# Altium PCB MainBoardSTM32.PcbDoc
Units mil, origin at the board's own origin, x right, y up, seen from the top; angles counter-clockwise.
Board outline 3645 x 3860 mil, 2 copper layers (Top Layer, Bottom Layer); 38 components, 43 nets, 174 pads, 187 vias.
Unrouted connection lines stored in the file: 7.
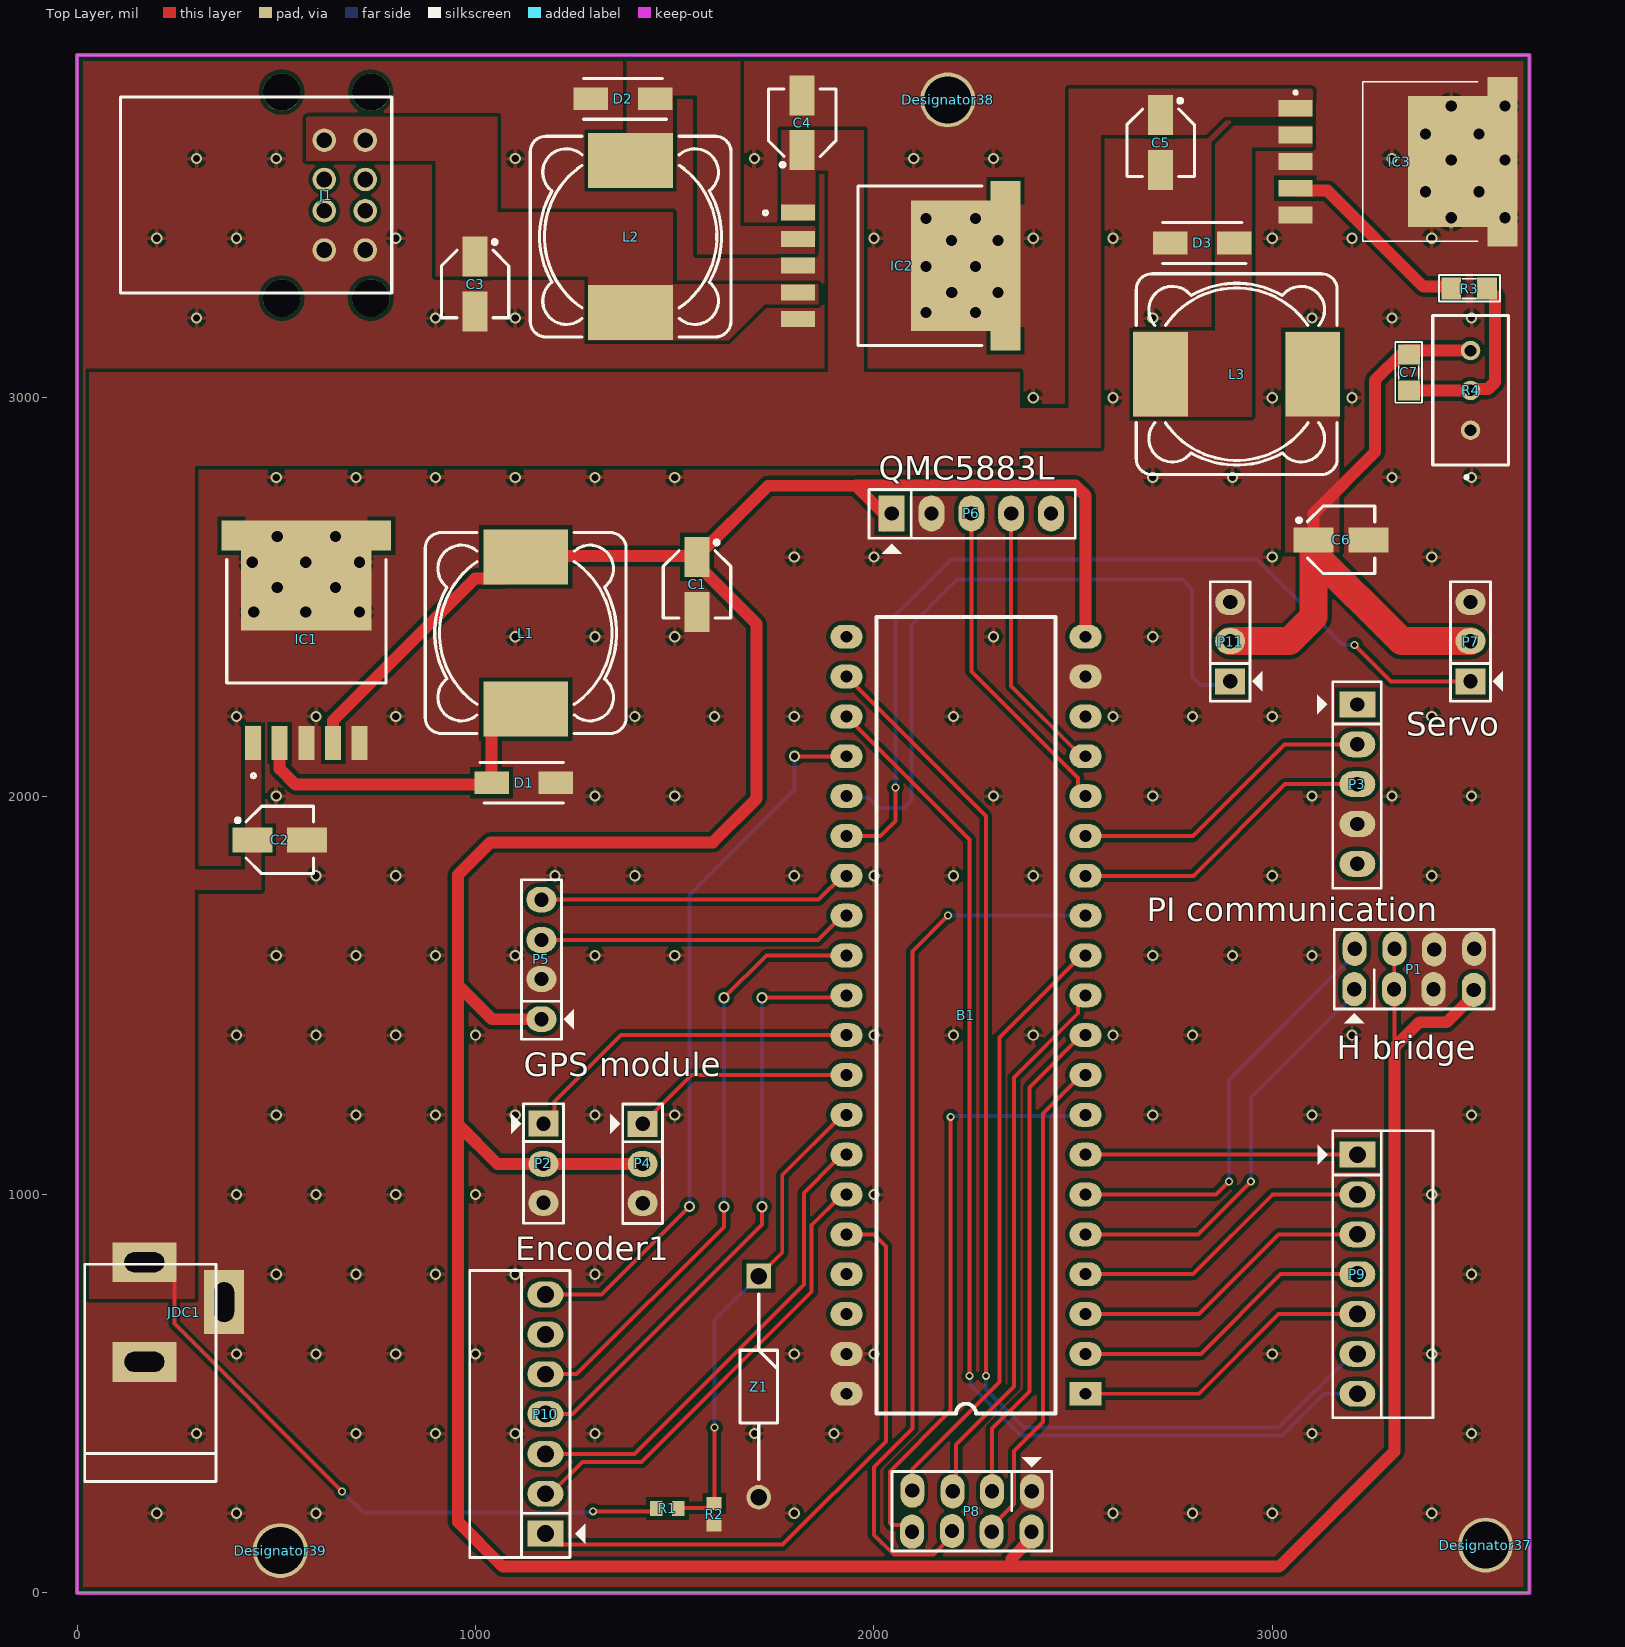
[diagram p0: Top Layer view]
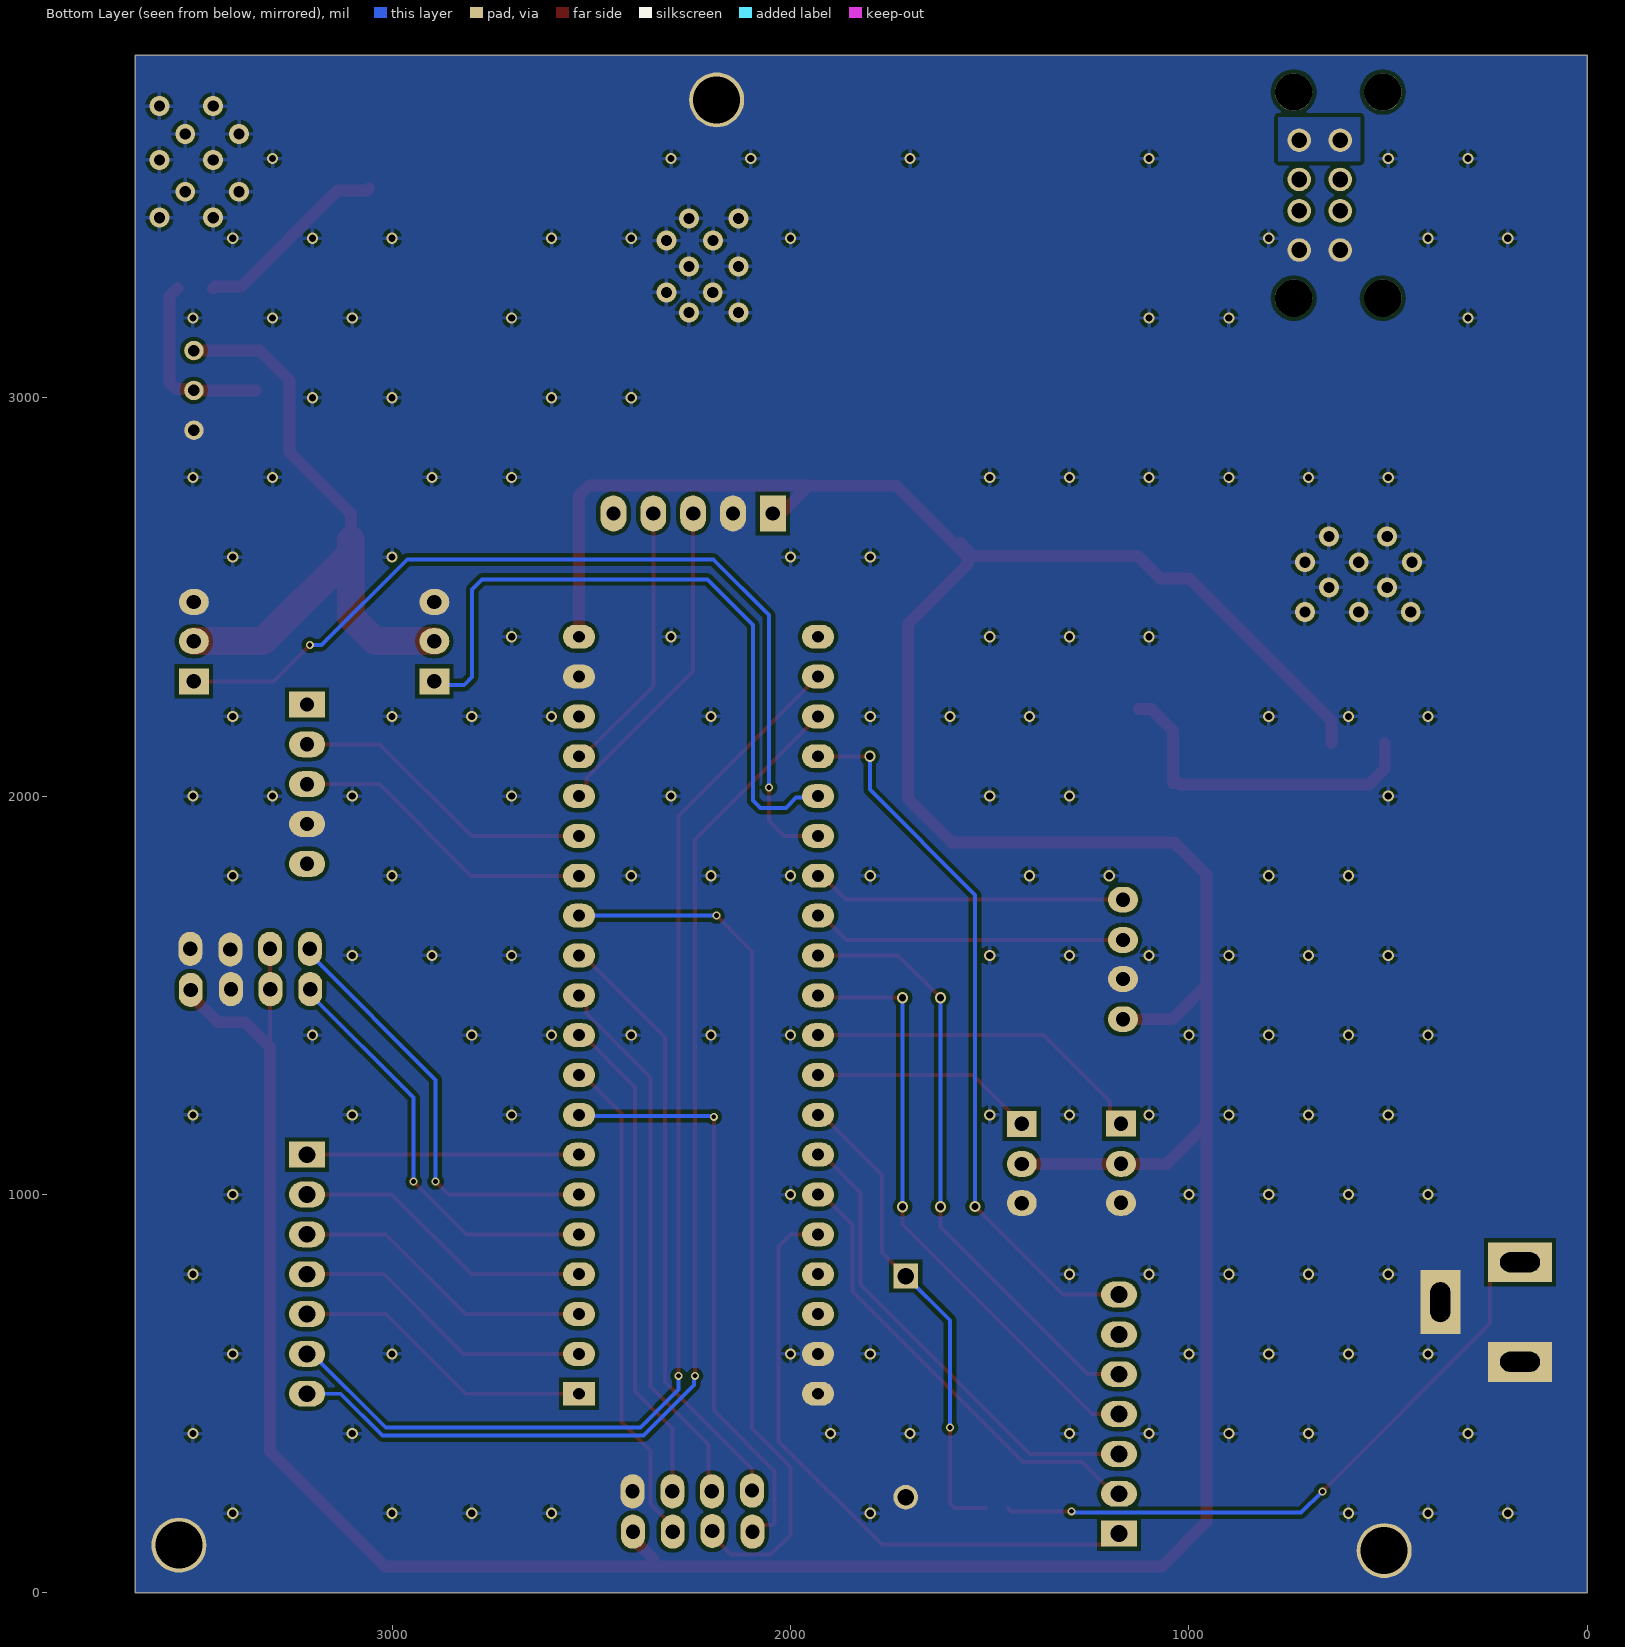
[diagram p1: Bottom Layer view, seen from below]
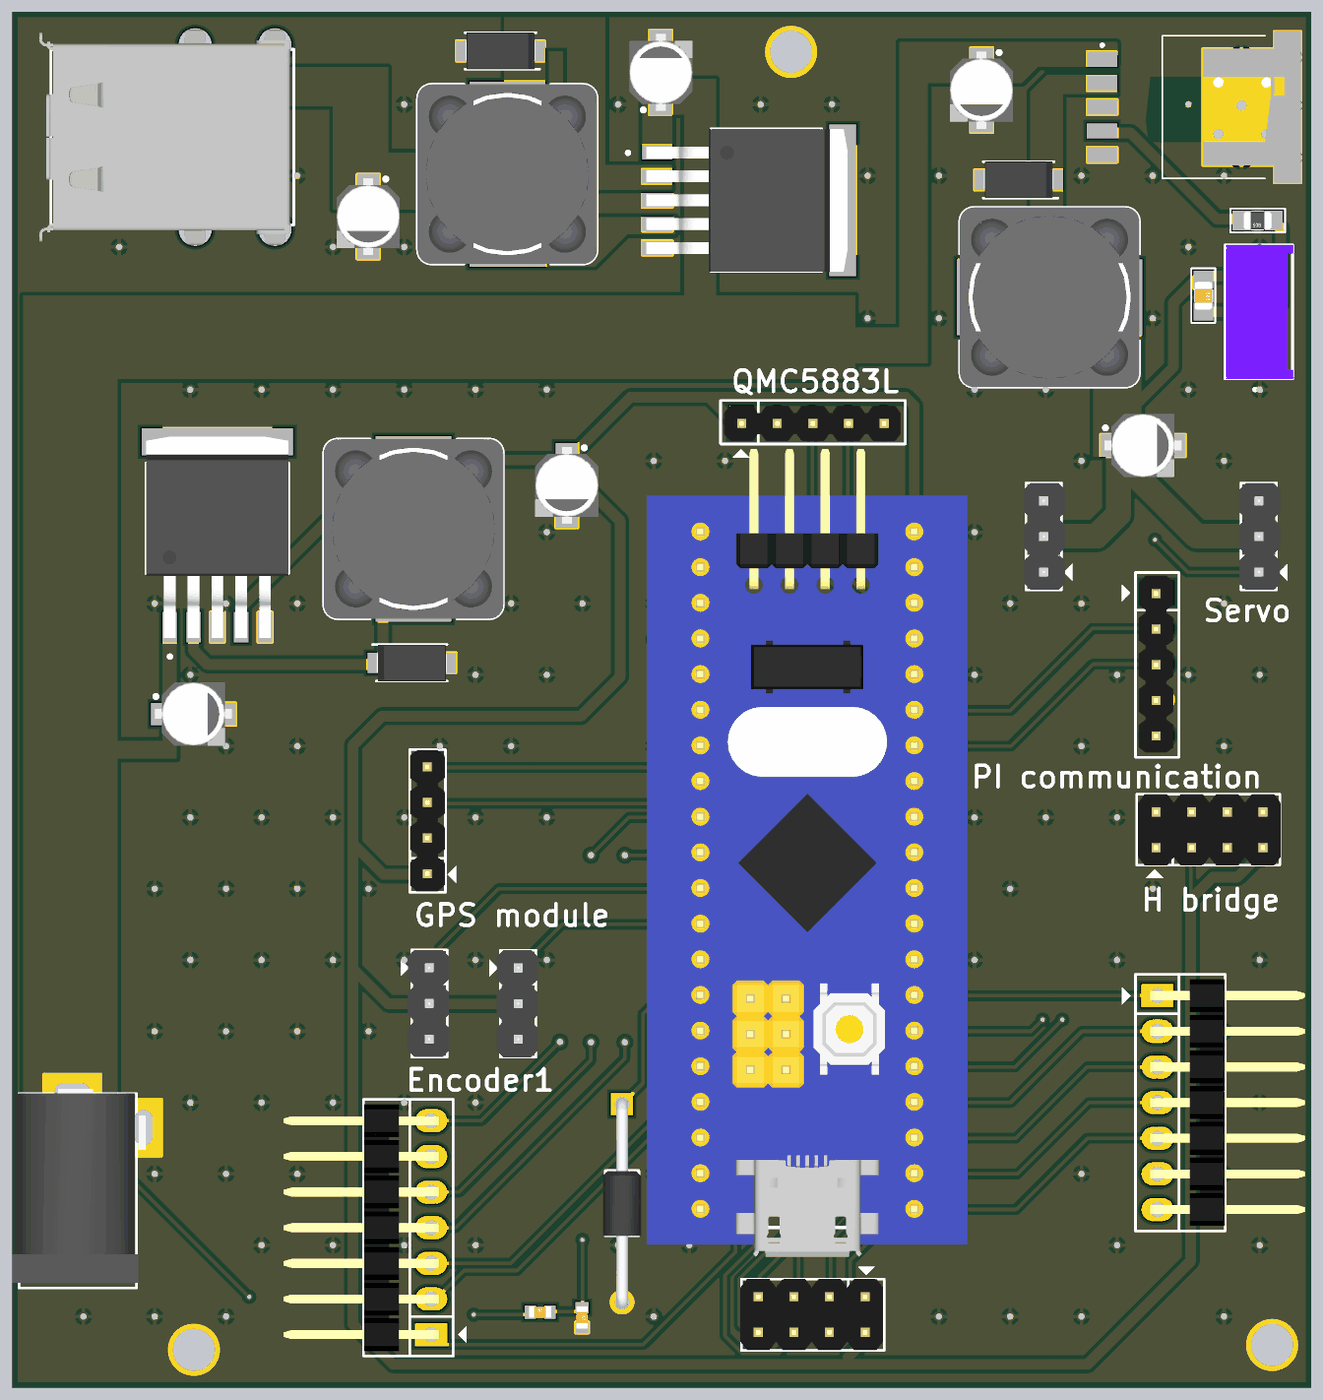
[diagram p2: 3D render of the assembled board from above, using the file's embedded part models]

## Layer stack, top to bottom
Top Solder: solder mask 0.4, Solder Resist, Dk 3.5
Top Layer: signal copper 1.4
Dielectric 1: dielectric 12.6, FR-4, Dk 4.8
Bottom Layer: signal copper 1.4
Bottom Solder: solder mask 0.4, Solder Resist, Dk 3.5

## Board outline
0,0 0,3860 3645,3860 3645,0

## Design rules (kind name [scope] priority, off if disabled: settings)
Clearance [All] p1: gap=10 ignorepadtopadclearanceinfootprint=FALSE except(0: Arc-Hole Track-Hole SMDPad-Hole THPad-Hole Via-Hole Fill-Hole Poly-Hole Region-Hole Text-Hole)
PolygonConnect PolygonConnect_39 [All vs IsNamedPolygon('Top Layer-GND')] p1: thpad.connectstyle=Direct thpad.reliefconductorwidth=10 thpad.reliefentries=4 thpad.polygonreliefangle="90 Angle" thpad.airgapwidth=10 smdpad.connectstyle=Direct smdpad.reliefconductorwidth=10 smdpad.reliefentries=4 smdpad.polygonreliefangle="90 Angle" smdpad.airgapwidth=10 via.connectstyle=Relief via.reliefconductorwidth=10 via.reliefentries=4 via.polygonreliefangle="90 Angle" via.airgapwidth=10
PolygonConnect PolygonConnect_38 [All vs IsNamedPolygon('Bottom Layer-GND')] p2: thpad.connectstyle=Direct thpad.reliefconductorwidth=10 thpad.reliefentries=4 thpad.polygonreliefangle="90 Angle" thpad.airgapwidth=10 smdpad.connectstyle=Direct smdpad.reliefconductorwidth=10 smdpad.reliefentries=4 smdpad.polygonreliefangle="90 Angle" smdpad.airgapwidth=10 via.connectstyle=Relief via.reliefconductorwidth=10 via.reliefentries=4 via.polygonreliefangle="90 Angle" via.airgapwidth=10
PolygonConnect PolygonConnect_37 [All vs IsNamedPolygon('Top Layer-GND')] p3: thpad.connectstyle=Direct thpad.reliefconductorwidth=10 thpad.reliefentries=4 thpad.polygonreliefangle="90 Angle" thpad.airgapwidth=10 smdpad.connectstyle=Direct smdpad.reliefconductorwidth=10 smdpad.reliefentries=4 smdpad.polygonreliefangle="90 Angle" smdpad.airgapwidth=10 via.connectstyle=Relief via.reliefconductorwidth=10 via.reliefentries=4 via.polygonreliefangle="90 Angle" via.airgapwidth=10
PolygonConnect PolygonConnect_36 [All vs IsNamedPolygon('Top Layer-No Net 1')] p4: thpad.connectstyle=Direct thpad.reliefconductorwidth=10 thpad.reliefentries=4 thpad.polygonreliefangle="90 Angle" thpad.airgapwidth=10 smdpad.connectstyle=Direct smdpad.reliefconductorwidth=10 smdpad.reliefentries=4 smdpad.polygonreliefangle="90 Angle" smdpad.airgapwidth=10 via.connectstyle=Relief via.reliefconductorwidth=10 via.reliefentries=4 via.polygonreliefangle="90 Angle" via.airgapwidth=10
PolygonConnect PolygonConnect_35 [All vs IsNamedPolygon('Top Layer-No Net')] p5: thpad.connectstyle=Direct thpad.reliefconductorwidth=10 thpad.reliefentries=4 thpad.polygonreliefangle="90 Angle" thpad.airgapwidth=10 smdpad.connectstyle=Direct smdpad.reliefconductorwidth=10 smdpad.reliefentries=4 smdpad.polygonreliefangle="90 Angle" smdpad.airgapwidth=10 via.connectstyle=Relief via.reliefconductorwidth=10 via.reliefentries=4 via.polygonreliefangle="90 Angle" via.airgapwidth=10
PolygonConnect PolygonConnect_34 [All vs IsNamedPolygon('Top Layer-12-5')] p6: thpad.connectstyle=Direct thpad.reliefconductorwidth=10 thpad.reliefentries=4 thpad.polygonreliefangle="90 Angle" thpad.airgapwidth=10 smdpad.connectstyle=Direct smdpad.reliefconductorwidth=10 smdpad.reliefentries=4 smdpad.polygonreliefangle="90 Angle" smdpad.airgapwidth=10 via.connectstyle=Relief via.reliefconductorwidth=10 via.reliefentries=4 via.polygonreliefangle="90 Angle" via.airgapwidth=10
PolygonConnect PolygonConnect_33 [All vs IsNamedPolygon('Top Layer-VCC6V')] p7: thpad.connectstyle=Direct thpad.reliefconductorwidth=10 thpad.reliefentries=4 thpad.polygonreliefangle="90 Angle" thpad.airgapwidth=10 smdpad.connectstyle=Direct smdpad.reliefconductorwidth=10 smdpad.reliefentries=4 smdpad.polygonreliefangle="90 Angle" smdpad.airgapwidth=10 via.connectstyle=Relief via.reliefconductorwidth=10 via.reliefentries=4 via.polygonreliefangle="90 Angle" via.airgapwidth=10
PolygonConnect PolygonConnect_32 [All vs IsNamedPolygon('Top Layer-output6V')] p8: thpad.connectstyle=Direct thpad.reliefconductorwidth=10 thpad.reliefentries=4 thpad.polygonreliefangle="90 Angle" thpad.airgapwidth=10 smdpad.connectstyle=Direct smdpad.reliefconductorwidth=10 smdpad.reliefentries=4 smdpad.polygonreliefangle="90 Angle" smdpad.airgapwidth=10 via.connectstyle=Relief via.reliefconductorwidth=10 via.reliefentries=4 via.polygonreliefangle="90 Angle" via.airgapwidth=10
PolygonConnect PolygonConnect_31 [All vs IsNamedPolygon('Top Layer-12-6')] p9: thpad.connectstyle=Direct thpad.reliefconductorwidth=10 thpad.reliefentries=4 thpad.polygonreliefangle="90 Angle" thpad.airgapwidth=10 smdpad.connectstyle=Direct smdpad.reliefconductorwidth=10 smdpad.reliefentries=4 smdpad.polygonreliefangle="90 Angle" smdpad.airgapwidth=10 via.connectstyle=Relief via.reliefconductorwidth=10 via.reliefentries=4 via.polygonreliefangle="90 Angle" via.airgapwidth=10
PolygonConnect PolygonConnect_30 [All vs IsNamedPolygon('Top Layer-VCC5V')] p10: thpad.connectstyle=Direct thpad.reliefconductorwidth=10 thpad.reliefentries=4 thpad.polygonreliefangle="90 Angle" thpad.airgapwidth=10 smdpad.connectstyle=Direct smdpad.reliefconductorwidth=10 smdpad.reliefentries=4 smdpad.polygonreliefangle="90 Angle" smdpad.airgapwidth=10 via.connectstyle=Relief via.reliefconductorwidth=10 via.reliefentries=4 via.polygonreliefangle="90 Angle" via.airgapwidth=10
PolygonConnect PolygonConnect_29 [All vs IsNamedPolygon('Top Layer-12-5')] p11: thpad.connectstyle=Direct thpad.reliefconductorwidth=10 thpad.reliefentries=4 thpad.polygonreliefangle="90 Angle" thpad.airgapwidth=10 smdpad.connectstyle=Direct smdpad.reliefconductorwidth=10 smdpad.reliefentries=4 smdpad.polygonreliefangle="90 Angle" smdpad.airgapwidth=10 via.connectstyle=Relief via.reliefconductorwidth=10 via.reliefentries=4 via.polygonreliefangle="90 Angle" via.airgapwidth=10
PolygonConnect PolygonConnect_28 [All vs IsNamedPolygon('Top Layer-output5v')] p12: thpad.connectstyle=Direct thpad.reliefconductorwidth=10 thpad.reliefentries=4 thpad.polygonreliefangle="90 Angle" thpad.airgapwidth=10 smdpad.connectstyle=Direct smdpad.reliefconductorwidth=10 smdpad.reliefentries=4 smdpad.polygonreliefangle="90 Angle" smdpad.airgapwidth=10 via.connectstyle=Relief via.reliefconductorwidth=10 via.reliefentries=4 via.polygonreliefangle="90 Angle" via.airgapwidth=10
PolygonConnect PolygonConnect_27 [All vs IsNamedPolygon('Top Layer-12-3')] p13: thpad.connectstyle=Direct thpad.reliefconductorwidth=10 thpad.reliefentries=4 thpad.polygonreliefangle="90 Angle" thpad.airgapwidth=10 smdpad.connectstyle=Direct smdpad.reliefconductorwidth=10 smdpad.reliefentries=4 smdpad.polygonreliefangle="90 Angle" smdpad.airgapwidth=10 via.connectstyle=Relief via.reliefconductorwidth=10 via.reliefentries=4 via.polygonreliefangle="90 Angle" via.airgapwidth=10
PolygonConnect PolygonConnect_26 [All vs IsNamedPolygon('Top Layer-VCC6V')] p14: thpad.connectstyle=Direct thpad.reliefconductorwidth=10 thpad.reliefentries=4 thpad.polygonreliefangle="90 Angle" thpad.airgapwidth=10 smdpad.connectstyle=Direct smdpad.reliefconductorwidth=10 smdpad.reliefentries=4 smdpad.polygonreliefangle="90 Angle" smdpad.airgapwidth=10 via.connectstyle=Relief via.reliefconductorwidth=10 via.reliefentries=4 via.polygonreliefangle="90 Angle" via.airgapwidth=10
PolygonConnect PolygonConnect_25 [All vs IsNamedPolygon('Bottom Layer-GND')] p15: thpad.connectstyle=Direct thpad.reliefconductorwidth=10 thpad.reliefentries=4 thpad.polygonreliefangle="90 Angle" thpad.airgapwidth=10 smdpad.connectstyle=Direct smdpad.reliefconductorwidth=10 smdpad.reliefentries=4 smdpad.polygonreliefangle="90 Angle" smdpad.airgapwidth=10 via.connectstyle=Relief via.reliefconductorwidth=10 via.reliefentries=4 via.polygonreliefangle="90 Angle" via.airgapwidth=10
PolygonConnect PolygonConnect_24 [All vs IsNamedPolygon('Top Layer-GND')] p16: thpad.connectstyle=Direct thpad.reliefconductorwidth=10 thpad.reliefentries=4 thpad.polygonreliefangle="90 Angle" thpad.airgapwidth=10 smdpad.connectstyle=Direct smdpad.reliefconductorwidth=10 smdpad.reliefentries=4 smdpad.polygonreliefangle="90 Angle" smdpad.airgapwidth=10 via.connectstyle=Relief via.reliefconductorwidth=10 via.reliefentries=4 via.polygonreliefangle="90 Angle" via.airgapwidth=10
PolygonConnect PolygonConnect_23 [All vs IsNamedPolygon('Bottom Layer-5V')] p17: thpad.connectstyle=Direct thpad.reliefconductorwidth=10 thpad.reliefentries=4 thpad.polygonreliefangle="90 Angle" thpad.airgapwidth=10 smdpad.connectstyle=Direct smdpad.reliefconductorwidth=10 smdpad.reliefentries=4 smdpad.polygonreliefangle="90 Angle" smdpad.airgapwidth=10 via.connectstyle=Relief via.reliefconductorwidth=10 via.reliefentries=4 via.polygonreliefangle="90 Angle" via.airgapwidth=10
PolygonConnect PolygonConnect_22 [All vs IsNamedPolygon('Top Layer-GND')] p18: thpad.connectstyle=Direct thpad.reliefconductorwidth=10 thpad.reliefentries=4 thpad.polygonreliefangle="90 Angle" thpad.airgapwidth=10 smdpad.connectstyle=Direct smdpad.reliefconductorwidth=10 smdpad.reliefentries=4 smdpad.polygonreliefangle="90 Angle" smdpad.airgapwidth=10 via.connectstyle=Relief via.reliefconductorwidth=10 via.reliefentries=4 via.polygonreliefangle="90 Angle" via.airgapwidth=10
PolygonConnect PolygonConnect_21 [All vs IsNamedPolygon('Top Layer-12-3')] p19: thpad.connectstyle=Direct thpad.reliefconductorwidth=10 thpad.reliefentries=4 thpad.polygonreliefangle="90 Angle" thpad.airgapwidth=10 smdpad.connectstyle=Direct smdpad.reliefconductorwidth=10 smdpad.reliefentries=4 smdpad.polygonreliefangle="90 Angle" smdpad.airgapwidth=10 via.connectstyle=Relief via.reliefconductorwidth=10 via.reliefentries=4 via.polygonreliefangle="90 Angle" via.airgapwidth=10
PolygonConnect PolygonConnect_20 [All vs IsNamedPolygon('Top Layer-No Net 8')] p20: thpad.connectstyle=Direct thpad.reliefconductorwidth=10 thpad.reliefentries=4 thpad.polygonreliefangle="90 Angle" thpad.airgapwidth=10 smdpad.connectstyle=Direct smdpad.reliefconductorwidth=10 smdpad.reliefentries=4 smdpad.polygonreliefangle="90 Angle" smdpad.airgapwidth=10 via.connectstyle=Relief via.reliefconductorwidth=10 via.reliefentries=4 via.polygonreliefangle="90 Angle" via.airgapwidth=10
PolygonConnect PolygonConnect_19 [All vs IsNamedPolygon('Top Layer-No Net 8')] p21: thpad.connectstyle=Direct thpad.reliefconductorwidth=10 thpad.reliefentries=4 thpad.polygonreliefangle="90 Angle" thpad.airgapwidth=10 smdpad.connectstyle=Direct smdpad.reliefconductorwidth=10 smdpad.reliefentries=4 smdpad.polygonreliefangle="90 Angle" smdpad.airgapwidth=10 via.connectstyle=Relief via.reliefconductorwidth=10 via.reliefentries=4 via.polygonreliefangle="90 Angle" via.airgapwidth=10
PolygonConnect PolygonConnect_18 [All vs IsNamedPolygon('Top Layer-No Net 9')] p22: thpad.connectstyle=Direct thpad.reliefconductorwidth=10 thpad.reliefentries=4 thpad.polygonreliefangle="90 Angle" thpad.airgapwidth=10 smdpad.connectstyle=Direct smdpad.reliefconductorwidth=10 smdpad.reliefentries=4 smdpad.polygonreliefangle="90 Angle" smdpad.airgapwidth=10 via.connectstyle=Relief via.reliefconductorwidth=10 via.reliefentries=4 via.polygonreliefangle="90 Angle" via.airgapwidth=10
PolygonConnect PolygonConnect_17 [All vs IsNamedPolygon('Top Layer- 12V Main')] p23: thpad.connectstyle=Direct thpad.reliefconductorwidth=10 thpad.reliefentries=4 thpad.polygonreliefangle="90 Angle" thpad.airgapwidth=10 smdpad.connectstyle=Direct smdpad.reliefconductorwidth=10 smdpad.reliefentries=4 smdpad.polygonreliefangle="90 Angle" smdpad.airgapwidth=10 via.connectstyle=Relief via.reliefconductorwidth=10 via.reliefentries=4 via.polygonreliefangle="90 Angle" via.airgapwidth=10
PolygonConnect PolygonConnect_16 [All vs IsNamedPolygon('Top Layer-output6V')] p24: thpad.connectstyle=Direct thpad.reliefconductorwidth=10 thpad.reliefentries=4 thpad.polygonreliefangle="90 Angle" thpad.airgapwidth=10 smdpad.connectstyle=Direct smdpad.reliefconductorwidth=10 smdpad.reliefentries=4 smdpad.polygonreliefangle="90 Angle" smdpad.airgapwidth=10 via.connectstyle=Relief via.reliefconductorwidth=10 via.reliefentries=4 via.polygonreliefangle="90 Angle" via.airgapwidth=10
PolygonConnect PolygonConnect_15 [All vs IsNamedPolygon('Top Layer-No Net 2')] p25: thpad.connectstyle=Direct thpad.reliefconductorwidth=10 thpad.reliefentries=4 thpad.polygonreliefangle="90 Angle" thpad.airgapwidth=10 smdpad.connectstyle=Direct smdpad.reliefconductorwidth=10 smdpad.reliefentries=4 smdpad.polygonreliefangle="90 Angle" smdpad.airgapwidth=10 via.connectstyle=Relief via.reliefconductorwidth=10 via.reliefentries=4 via.polygonreliefangle="90 Angle" via.airgapwidth=10
PolygonConnect PolygonConnect_14 [All vs IsNamedPolygon('Top Layer- 12-5')] p26: thpad.connectstyle=Direct thpad.reliefconductorwidth=10 thpad.reliefentries=4 thpad.polygonreliefangle="90 Angle" thpad.airgapwidth=10 smdpad.connectstyle=Direct smdpad.reliefconductorwidth=10 smdpad.reliefentries=4 smdpad.polygonreliefangle="90 Angle" smdpad.airgapwidth=10 via.connectstyle=Relief via.reliefconductorwidth=10 via.reliefentries=4 via.polygonreliefangle="90 Angle" via.airgapwidth=10
PolygonConnect PolygonConnect_13 [All vs IsNamedPolygon('Top Layer-12-6')] p27: thpad.connectstyle=Direct thpad.reliefconductorwidth=10 thpad.reliefentries=4 thpad.polygonreliefangle="90 Angle" thpad.airgapwidth=10 smdpad.connectstyle=Direct smdpad.reliefconductorwidth=10 smdpad.reliefentries=4 smdpad.polygonreliefangle="90 Angle" smdpad.airgapwidth=10 via.connectstyle=Relief via.reliefconductorwidth=10 via.reliefentries=4 via.polygonreliefangle="90 Angle" via.airgapwidth=10
PolygonConnect PolygonConnect_12 [All vs IsNamedPolygon('Top Layer-12-5')] p28: thpad.connectstyle=Direct thpad.reliefconductorwidth=10 thpad.reliefentries=4 thpad.polygonreliefangle="90 Angle" thpad.airgapwidth=10 smdpad.connectstyle=Direct smdpad.reliefconductorwidth=10 smdpad.reliefentries=4 smdpad.polygonreliefangle="90 Angle" smdpad.airgapwidth=10 via.connectstyle=Relief via.reliefconductorwidth=10 via.reliefentries=4 via.polygonreliefangle="90 Angle" via.airgapwidth=10
PolygonConnect PolygonConnect_11 [All vs IsNamedPolygon('Top Layer-12-6')] p29: connectstyle=Direct reliefconductorwidth=10 reliefentries=4 polygonreliefangle="90 Angle" airgapwidth=10
PolygonConnect PolygonConnect_10 [All vs IsNamedPolygon('Top Layer-12-6')] p30: connectstyle=Direct reliefconductorwidth=10 reliefentries=4 polygonreliefangle="90 Angle" airgapwidth=10
PolygonConnect PolygonConnect_9 [All vs IsNamedPolygon('Top Layer-12-5')] p31: connectstyle=Direct reliefconductorwidth=10 reliefentries=4 polygonreliefangle="90 Angle" airgapwidth=10
PolygonConnect PolygonConnect_8 [All vs IsNamedPolygon('Top Layer-12-6')] p32: connectstyle=Direct reliefconductorwidth=10 reliefentries=4 polygonreliefangle="90 Angle" airgapwidth=10
PolygonConnect PolygonConnect_7 [All vs IsNamedPolygon('Top Layer- 12-5')] p33: connectstyle=Direct reliefconductorwidth=10 reliefentries=4 polygonreliefangle="90 Angle" airgapwidth=10
PolygonConnect PolygonConnect_6 [InNet('OUTPUT5V') vs IsNamedPolygon('Top Layer-No Net 2')] p34: connectstyle=Direct reliefconductorwidth=10 reliefentries=4 polygonreliefangle="90 Angle" airgapwidth=10
PolygonConnect PolygonConnect_5 [All vs IsNamedPolygon('Top Layer-No Net 2')] p35: connectstyle=Direct reliefconductorwidth=10 reliefentries=4 polygonreliefangle="90 Angle" airgapwidth=10
PolygonConnect PolygonConnect_4 [All vs IsNamedPolygon('Top Layer-No Net 2')] p36: thpad.connectstyle=Direct thpad.reliefconductorwidth=10 thpad.reliefentries=4 thpad.polygonreliefangle="90 Angle" thpad.airgapwidth=10 smdpad.connectstyle=Direct smdpad.reliefconductorwidth=10 smdpad.reliefentries=4 smdpad.polygonreliefangle="90 Angle" smdpad.airgapwidth=10 via.connectstyle=Relief via.reliefconductorwidth=10 via.reliefentries=4 via.polygonreliefangle="90 Angle" via.airgapwidth=10
PolygonConnect PolygonConnect_3 [All vs IsNamedPolygon('Top Layer-No Net 2')] p37: thpad.connectstyle=Direct thpad.reliefconductorwidth=10 thpad.reliefentries=4 thpad.polygonreliefangle="90 Angle" thpad.airgapwidth=10 smdpad.connectstyle=Direct smdpad.reliefconductorwidth=10 smdpad.reliefentries=4 smdpad.polygonreliefangle="90 Angle" smdpad.airgapwidth=10 via.connectstyle=Relief via.reliefconductorwidth=10 via.reliefentries=4 via.polygonreliefangle="90 Angle" via.airgapwidth=10
PolygonConnect PolygonConnect_2 [All vs IsNamedPolygon('Top Layer-output6V')] p38: thpad.connectstyle=Direct thpad.reliefconductorwidth=10 thpad.reliefentries=4 thpad.polygonreliefangle="90 Angle" thpad.airgapwidth=10 smdpad.connectstyle=Direct smdpad.reliefconductorwidth=10 smdpad.reliefentries=4 smdpad.polygonreliefangle="90 Angle" smdpad.airgapwidth=10 via.connectstyle=Relief via.reliefconductorwidth=10 via.reliefentries=4 via.polygonreliefangle="90 Angle" via.airgapwidth=10
PolygonConnect PolygonConnect_1 [All vs IsNamedPolygon('Top Layer- 12V Main')] p39: thpad.connectstyle=Direct thpad.reliefconductorwidth=10 thpad.reliefentries=4 thpad.polygonreliefangle="90 Angle" thpad.airgapwidth=10 smdpad.connectstyle=Direct smdpad.reliefconductorwidth=10 smdpad.reliefentries=4 smdpad.polygonreliefangle="90 Angle" smdpad.airgapwidth=10 via.connectstyle=Relief via.reliefconductorwidth=10 via.reliefentries=4 via.polygonreliefangle="90 Angle" via.airgapwidth=10
PolygonConnect [All] p40: connectstyle=Relief reliefconductorwidth=10 reliefentries=4 polygonreliefangle="90 Angle" airgapwidth=10
RoutingVias [All] p1: holewidth=18 width=30 viastyle="Through Hole" minholewidth=12 minwidth=20 maxholewidth=25 maxwidth=28
SolderMaskExpansion [All] p1: expansion=4
Width [All] p1: maxlimit=70 minlimit=10 preferedwidth=30 minimp=50.000000 maximp=50.000000 favimp=50.000000
30 further rules are at their usual default settings.

## Classes and differential pairs
component class MainBoardSTM32: B1 C1 C2 C3 C4 C5 C6 C7 D1 D2 D3 IC1 IC2 IC3 J1 JDC1 L1 L2 L3 P1 P2 P3 P4 P5 P6 P7 P8 P9 P10 P11 R1 R2 R3 R4 Z1

## Components (designator, comment, footprint, x,y, rotation, side; value= is the part's Value field where it differs from the comment)
B1 "Bluepill" Bluepill 2531.05,500 r180 top
C1 "Cap Pol SMD" "CAP ALU SIZE B" 1556.05,2531.41 r270 top value=220uF
C2 "Cap Pol SMD" "CAP ALU SIZE B" 508.7,1890 r0 top value=680uF
C3 "Cap Pol SMD" "CAP ALU SIZE B" 999.05,3285.24 r270 top value=220uF
C4 "Cap Pol SMD" "CAP ALU SIZE B" 1820,3690 r90 top value=680uF
C5 "Cin" "CAP ALU SIZE B" 2719.69,3640.02 r270 top value=470uF
C6 "Cout" "CAP ALU SIZE B" 3172.55,2643.29 r0 top value=220uF
C7 "CFF" CAP-SM-0805 3342.55,3108.29 r270 top value=680uF
D1 "SS54" DIOM5026X262N 1121.05,2033.46 r0 top
D2 "SS54" DIOM5026X262N 1370,3750 r180 top
D3 "SS54" DIOM5026X262N 2824.02,3388.29 r180 top
Designator37 "Comment" "LO KHOAN 3MM" 3535,120 r270 top
Designator38 "Comment" "LO KHOAN 3MM" 2185.39,3747.52 r270 top
Designator39 "Comment" "LO KHOAN 3MM" 510,106.5 r270 top
IC1 "LM2596SX-3.3_NOPB" KTT0005B 575.63,2624.05 r270 top
IC2 "LM2596S-5.0_NOPB" KTT0005B 2300.59,3331.14 r180 top
IC3 "LM2596S-ADJ_NOPB" LM2596SXADJ 3315.67,3592.6 r180 top
J1 "Pi's power" MOLEX-DUALUSB 620.63,3508.37 r270 top
JDC1 "Jack DC" DC-IN 269.12,705 r90 top value="Jac DC"
L1 "Inductor" "INDUCTOR 12.5x12.5" 1126.05,2409.37 r270 top value=33uH
L2 "Inductor" "INDUCTOR 12.5x12.5" 1389.37,3404.33 r90 top value=33uH
L3 "Inductor" "INDUCTOR 12.5x12.5" 2910.63,3059 r180 top value=33uH
P1 "H bridge" JP4x2 3356.05,1565 r0 top
P2 "Encoder1" JP3 1170.63,1078 r270 top
P3 "PI communication" JP5 3213.55,2230 r270 top
P4 "Encoder2" JP3 1419.63,1077.5 r270 top
P5 "GPS module" JP4 1165.63,1540 r90 top
P6 "QMC5883L" JP5 2044.53,2709.39 r0 top
P7 "Servo" JP3 3497.55,2388 r90 top
P8 "NRF24L01" JP4x2 2246.13,205.5 r180 top
P9 "Spare 2" JP7H 3213.55,1100 r270 top
P10 "Spare 1" JP7H 1175.63,149 r90 top
P11 "Header 3" JP3 2894.02,2388 r90 top
R1 "RESISTOR SMD" RES-SM-0603 1454.46,212 r0 top value=1K
R2 "RESISTOR SMD" RES-SM-0603 1599.02,224 r270 top value=1K
R3 "RESISTOR SMD" RES-SM-0805 3539.17,3274 r180 top value=1K
R4 "3296W-1-101LF" 3296W-1 3497.55,3018.29 r90 top
Z1 "1N4728ATR" DIOAD1413W86L463D238 1711.05,795.5 r270 top

## Footprints (in the part's own frame and the unit in brackets; to place one, negate y for a bottom-side part, rotate by r counter-clockwise, add the part's x,y. Pads: shape width x height; smd on the part's side, far side on the other; paste and mask are expansions set on the pad)
3296W-1 [mm]
  round 1.24 hole 0.74: 1(-2.54,0) 2(0,0) 3(2.54,0)
  silkscreen extent -5.64,-2.41 4.76,2.41, body extent -4.78,-2.48 4.78,2.35, height 11.55
Bluepill [mil]
  rect 80x60 / inner rect 100x50 / far side rect 80x60 hole 30: 1(0,0)
  oval 80x60 / inner oval 100x50 / far side oval 80x60 hole 30: 2(0,-100) 3(0,-200) 4(0,-300) 5(0,-400) 6(0,-500) 7(0,-600) 8(0,-700) 9(0,-800) 10(0,-900) 11(0,-1000) 12(0,-1100) 13(0,-1200) 14(0,-1300) 15(0,-1400) 16(0,-1500) 17(0,-1600) 18(0,-1700) 19(0,-1800) 20(0,-1900) 21(600,-1900) 22(600,-1800) 23(600,-1700) 24(600,-1600) 25(600,-1500) 26(600,-1400) 27(600,-1300) 28(600,-1200) 29(600,-1100) 30(600,-1000) 31(600,-900) 32(600,-800) 33(600,-700) 34(600,-600) 35(600,-500) 36(600,-400) 37(600,-300) 38(600,-200) 39(600,-100) 40(600,0)
  silkscreen extent 75,-1950 525,50, body extent -1100,-2133 1000,500, height 385
"CAP ALU SIZE B" [mm] "Capacitor, Aluminium Electrolytric, 4.3mm L X 4.3mm W X 5.4mm H, IPC Medium Density"
  rect 2.55x1.6 smd: 1(-1.75,0) 2(1.75,0)
  silkscreen extent -2.8,-2.15 2.15,2.15, body extent -2.75,-2.25 2.75,2.25, height 5.7
CAP-SM-0805 [mil]
  rect 50x55 smd: 1(0,0) 2(90,0)
  silkscreen extent -32,-34 121,33, body extent 6,-25 84,25, height 31
DC-IN [mil] "Jac DC input"
  rect 100x160 hole 50 slot 100 at 90 deg: 1(125,100) 2(-125,100)
  rect 160x100 hole 50 slot 100 at 0 deg: 3(25,-100)
  silkscreen extent -425,-80 120,250, body extent -410,-105 134,269, height 434
DIOAD1413W86L463D238 [mm]
  rect 1.575x1.575 hole 1.05: 1(0,0)
  round 1.575 hole 1.05: 2(14.1,0)
  silkscreen extent 1.14,-1.19 12.96,1.19, body extent -0.43,-1.36 14.56,1.36, height 2.71
DIOM5026X262N [mm]
  rect 2.2x1.45 smd: 1(-2.05,0) 2(2.05,0)
  silkscreen extent -2.78,-1.3 2.52,1.3, body extent -2.52,-1.3 2.52,1.3, height 2.62
"INDUCTOR 12.5x12.5" [mm] "SMD Inductor  Body Width 12.5mm Body Lenght 12.5mm Height 8mm"
  rect 3.5x5.4 smd: 1(-4.85,0) 2(4.85,0)
  silkscreen extent -6.4,-6.4 6.4,6.4, body extent -6.4,-6.4 6.4,6.4, height 8
JP3 [mil] "Jumper 3"
  rect 65x75 hole 36: 1(-100,0)
  oval 65x75 hole 36: 2(1,0) 3(99,0)
  silkscreen extent -150,-81 150,50, body extent -150,-60 150,55, height 355
JP4 [mil] "Jumper 4"
  oval 65x75 hole 36: 1(-100,0) 2(1,0) 3(99,0) 4(200,0)
  silkscreen extent -150,-81 250,50, body extent -148,-48 248,50, height 323
JP4x2 [mil] "Connector 4x2"
  oval 60x86 hole 36: 1(-150.5,-49.5) 2(-50.5,-49.5) 3(48.5,-49.5) 4(149.5,-51.5) 5(-149.5,51.5) 6(-49.5,51.5) 7(50,50) 8(150.5,51.5)
  silkscreen extent -200,-135 200,100, body extent -197,-100 203,100, height 335
JP5 [mil] "JP5"
  rect 65x90 hole 36: 1(0,0)
  oval 65x90 hole 36: 2(100,0) 3(200,0) 4(300,0) 5(400,0)
  silkscreen extent -57,-101 461,60, body extent -48,-53 448,45, height 323
JP7H [mil]
  rect 65x90 hole 42: 1(0,0)
  oval 65x90 hole 42: 2(100,0) 3(200,0) 4(300,0) 5(400,0) 6(500,0) 7(600,0)
  silkscreen extent -60,-100 660,190, body extent -46,-25 646,414, height 99
KTT0005B [mm]
  rect 2.16x1.02 smd: 1(12.461,-3.4) 2(12.461,-1.7) 3(12.461,0) 4(12.461,1.7) 5(12.461,3.4)
  rect 6.99x8.33 smd: 6(1.786,0)
  rect 1.91x1.235 smd: 7(-0.754,4.782) 8(-0.754,-4.782)
  silkscreen extent 0.76,-5.08 14.68,5.08, body extent -1.11,-5.08 13.24,5.08, height 4.72
LM2596SXADJ [mm]
  rect 2.16x1.07 smd: 1(6.545,-3.4) 2(6.545,-1.7) 3(6.545,0) 4(6.545,1.7) 5(6.545,3.4)
  rect 1.91x10.8 smd: T1(-6.67,0)
  rect 5.08x8.33 smd: T2(-3.175,0)
  silkscreen extent -5.06,-5.08 6.64,5.08, body extent -6.75,-2.3 7.65,2.5
"LO KHOAN 3MM" [mil]
  round 138 hole 118.1: 1(0,0)
MOLEX-DUALUSB [mm]
  round 1.5 hole 1: 1(-3.5,0) 2(-1,0) 3(1,0) 4(3.5,0) 5(-3.5,2.61) 6(-1,2.61) 7(1,2.61) 8(3.5,2.61)
  round 2.38 hole 2.38 unplated: 9(-6.57,2.96) 10(6.57,2.96) 11(6.57,-2.72) 12(-6.57,-2.72)
  silkscreen extent -6.25,-13 6.25,4.3, body extent -7.66,-13.82 7.66,4.04, height 15.78
RES-SM-0603 [mm]
  rect 0.8x0.95 smd: 1(-0.014,0) 2(1.386,0)
  body extent -0.11,-0.4 1.49,0.4, height 0.3
RES-SM-0805 [mil]
  rect 50x55 smd: 1(0,0) 2(90,0)
  silkscreen extent -32,-34 121,33, body extent 6,-25 84,25, height 31

## Part data
C1 C2 C3 C4: "Polarized Capacitor (Radial)"
C5 C6: library part "Cap Pol SMD", "Polarized Capacitor (Radial)"
C7: library part "Cap Non-Pol SMD", "Capacitor"
D1 D2 D3: "Schottky Diode", Manufacturer_Name="DIYI Elec Tech", Datasheet Link=https://datasheet.lcsc.com/szlcsc/DIYI-Elec-Tech-SS54_C84165.pdf, Height=2.62mm, Manufacturer_Part_Number=SS54
IC1: "Integrated Circuit", Arrow Part Number=LM2596SX-3.3/NOPB, Manufacturer_Name="Texas Instruments", Mouser Part Number=926-LM2596SX33NOPB, Arrow Price/Stock=https://www.arrow.com/en/products/lm2596sx-3.3nopb/texas-instruments?region=nac, Datasheet Link=http://www.ti.com/lit/gpn/lm2596, Manufacturer_Part_Number=LM2596SX-3.3/NOPB, Mouser Price/Stock=https://www.mouser.co.uk/ProductDetail/Texas-Instruments/LM2596SX-33-NOPB?qs=X1J7HmVL2ZEm4UYTFC0WWA%3D%3D
IC2: "Integrated Circuit", Arrow Part Number=LM2596S-5.0/NOPB, Manufacturer_Name="Texas Instruments", Mouser Part Number=926-LM2596S-5.0/NOPB, Arrow Price/Stock=https://www.arrow.com/en/products/lm2596s-5.0nopb/texas-instruments?region=nac, Datasheet Link=https://www.ti.com/lit/gpn/LM2596, Manufacturer_Part_Number=LM2596S-5.0/NOPB, Mouser Price/Stock=https://www.mouser.co.uk/ProductDetail/Texas-Instruments/LM2596S-50-NOPB?qs=X1J7HmVL2ZHVjCOmW%252BYINA%3D%3D
IC3: "Integrated Circuit", Arrow Part Number=LM2596S-ADJ/NOPB, Manufacturer_Name="Texas Instruments", Mouser Part Number=926-LM2596S-ADJ/NOPB, Arrow Price/Stock=https://www.arrow.com/en/products/lm2596s-adjnopb/texas-instruments?region=nac, Datasheet Link=https://www.ti.com/lit/ds/symlink/lm2596.pdf?HQS=ti-null-null-sf-df-pf-sep-wwe&ts=1592978195629, Height=4.57mm, Manufacturer_Part_Number=LM2596S-ADJ/NOPB, Mouser Price/Stock=https://www.mouser.co.uk/ProductDetail/Texas-Instruments/LM2596S-ADJ-NOPB?qs=X1J7HmVL2ZHoMN0DLDcNog%3D%3D
J1: library part 67298-3090, "Connector", Manufacturer_Name=Molex, Mouser Part Number=538-67298-3090, Datasheet Link=https://datasheet.datasheetarchive.com/originals/distributors/Datasheets_SAMA/769e69235f305794a0165724e99951b5.pdf, Manufacturer_Part_Number=67298-3090, Mouser Price/Stock=https://www.mouser.co.uk/ProductDetail/Molex/67298-3090?qs=x6EjVpvqMVOYHaae5plDDQ%3D%3D
JDC1: "Jack DC input"
P1 P8: library part "Header 4X2", "Header, 4-Pin, Dual row", LatestRevisionDate=17-Jul-2002, LatestRevisionNote="Re-released for DXP Platform.", Publisher="Altium Limited"
P2 P4 P7: library part "Header 3", "Header, 3-Pin", LatestRevisionDate=17-Jul-2002, LatestRevisionNote="Re-released for DXP Platform.", Publisher="Altium Limited"
P3 P6: library part "Header 5", "Header, 5-Pin", LatestRevisionDate=17-Jul-2002, LatestRevisionNote="Re-released for DXP Platform.", Publisher="Altium Limited"
P5: library part "Header 4", "Header, 4-Pin", LatestRevisionDate=17-Jul-2002, LatestRevisionNote="Re-released for DXP Platform.", Publisher="Altium Limited"
P9 P10: library part "Header 7H", "Header, 7-Pin, Right Angle", LatestRevisionDate=17-Jul-2002, LatestRevisionNote="Re-released for DXP Platform.", Publisher="Altium Limited"
P11: "Header, 3-Pin", LatestRevisionDate=17-Jul-2002, LatestRevisionNote="Re-released for DXP Platform.", Publisher="Altium Limited"
R1 R2 R3: "Resistor"
R4: "Resistor", Manufacturer_Name=Bourns, Mouser Part Number=652-3296W-1-101LF, Arrow Part Number=3296W-1-101LF, Arrow Price/Stock=https://www.arrow.com/en/products/3296w-1-101lf/bourns?region=nac, Datasheet Link=https://www.bourns.com/pdfs/3296.pdf, Manufacturer_Part_Number=3296W-1-101LF, Mouser Price/Stock=https://www.mouser.co.uk/ProductDetail/Bourns/3296W-1-101LF?qs=UcU9LKO1dwEefwKxVJG4Jw%3D%3D
Z1: "Zener Diode", Manufacturer_Name=onsemi, Mouser Part Number=512-1N4728ATR, Arrow Part Number=1N4728ATR, Arrow Price/Stock=https://www.arrow.com/en/products/1n4728atr/on-semiconductor?region=nac, Datasheet Link=http://www.onsemi.com/pub/Collateral/1N4736AT-D.PDF, Manufacturer_Part_Number=1N4728ATR, Mouser Price/Stock=https://www.mouser.co.uk/ProductDetail/ON-Semiconductor-Fairchild/1N4728ATR?qs=2V4k6Hs0nQm1Vo9UQ1sIIw%3D%3D

## Via types
v1: diameter 28, hole 18, Top Layer to Bottom Layer, tented both sides, 146 vias
v2: diameter 50, hole 28, Top Layer to Bottom Layer, tented both sides, 30 vias
v3: diameter 20, hole 12, Top Layer to Bottom Layer, tented both sides, 11 vias

## Nets (pads, with @x,y where several pads share a name; then routed paths per layer and width w, separated by ;. In a path a pad name is that pad's centre, name@x,y a point inside that pad or via, vN(x,y) a via of type N, cw(c..) or ccw(c..) an arc to the next point about the centre after c; other vN are vias at no path point)
12V: C2.1 C4.1 C5.1 IC1.1 IC2.1 IC3.1 JDC1.1 R1.1 | length 1613.4
  Top Layer w10: JDC1.1 199.12,830 244.12,785 244.12,675.88 v3(665,255) ; v3(1295,205) 1446.9,205 R1.1
  Bottom Layer w10: v3(665,255) 718.5,201.5 1288.79,201.5 1292.29,205 v3(1295,205)
Encoder1: B1.31 P2.1 | length 868.6
  Top Layer w10: P2.1 1198.13,1205.5 1198.13,1233.12 1365.02,1400 B1.31
Encoder2: B1.32 P4.1 | length 562.2
  Top Layer w10: P4.1 1542.13,1300 B1.32
FB6V: IC3.4 R3.2 | length 495.4
  Top Layer w30: IC3.4 3064.05,3519.6 3138.41,3519.6 3379.17,3278.85 3444.32,3278.85 R3.2
GND: B1.19 B1.39 B1.40 C1.2 C2.2 C3.2 C4.2 C5.2 C6.2 D1.2 D2.2 D3.2 Designator37.1 Designator38.1 Designator39.1 IC1.3 IC1.5 IC1.6 IC2.3 IC2.5 IC2.6 IC3.3 IC3.5 IC3.T1 IC3.T2 J1.4 J1.8 JDC1.2 JDC1.3 P1.3 P1.7 P1.8 P2.3 P3.4 P4.3 P5.2 P6.2 P7.3 P8.1 P11.3 R2.2 R4.1 Z1.2
  other v1: 200,200 400,200 600,200 1800,200 2600,200 2800,200 3000,200 3400,200 300,400 700,400 900,400 1100,400 1300,400 1700,400 1900,400 3100,400 3500,400 400,600 600,600 800,600 1000,600 1800,600 2000,600 3000,600 3400,600 500,800 700,800 900,800 1100,800 1300,800 3500,800 400,1000 600,1000 800,1000 1000,1000 2000,1000 3400,1000 500,1200 700,1200 900,1200 1100,1200 1300,1200 1500,1200 2700,1200 3100,1200 3500,1200 400,1400 600,1400 800,1400 1000,1400 2000,1400 2200,1400 2400,1400 2600,1400 2800,1400 3200,1400 500,1600 700,1600 900,1600 1100,1600 1300,1600 1500,1600 2700,1600 2900,1600 3100,1600 600,1800 800,1800 1200,1800 1400,1800 1800,1800 2000,1800 2200,1800 2400,1800 3000,1800 3400,1800 500,2000 1300,2000 1500,2000 2300,2000 2700,2000 3100,2000 3300,2000 3500,2000 400,2200 600,2200 800,2200 1400,2200 1600,2200 1800,2200 2200,2200 2600,2200 2800,2200 3000,2200 3400,2200 1100,2400 1300,2400 1500,2400 2300,2400 2700,2400 1800,2600 2000,2600 3000,2600 3400,2600 500,2800 700,2800 900,2800 1100,2800 1300,2800 1500,2800 2700,2800 2900,2800 3300,2800 3500,2800 2400,3000 2600,3000 3000,3000 3200,3000 300,3200 900,3200 1100,3200 2700,3200 3100,3200 3300,3200 3500,3200 200,3400 400,3400 800,3400 2000,3400 2400,3400 2600,3400 3000,3400 3200,3400 3400,3400 300,3600 500,3600 1100,3600 1700,3600 2100,3600 2300,3600 3300,3600
  other v2: 443.45,2461.96 573.93,2461.96 708.93,2461.96 502.5,2523.74 648.93,2523.74 439.9,2586.96 573.93,2586.96 708.93,2586.96 502.5,2651.96 648.93,2651.96 2131.1,3213.7 2255,3213.7 2195.39,3264.21 2311.57,3264.21 2131.1,3329.5 2255,3329.5 2194.52,3394.5 2311.57,3394.5 2131.1,3449.92 2255,3449.92 3449.17,3451.8 3584.17,3451.8 3384.17,3516.8 3519.17,3516.8 3449.17,3596.8 3584.17,3596.8 3384.17,3661.8 3519.17,3661.8 3449.17,3731.8 3584.17,3731.8
I2C1_SCL: B1.16 P6.3 | length 828.1
  Top Layer w10: P6.3 2244.53,2312.88 2512.41,2045 2512.41,2018.64 B1.16
I2C1_SDA: B1.17 P6.4 | length 692.5
  Top Layer w10: P6.4 2344.53,2276.52 2521.05,2100 B1.17
LPWM: B1.6 P1.5 | length 1088.9
  Top Layer w10: B1.6@2531.55,1000.5 B1.6 2858.55,1000 v3(2891.05,1032.5)
  Bottom Layer w10: v3(2891.05,1032.5) 2891.05,1288 3206.55,1603.5 P1.5
MCU_RX-GPS_TX: B1.28 P5.3 | length 790.7
  Top Layer w10: P5.3 1860.05,1639 1921.05,1700 B1.28
MCU_RX-PI_TX: B1.15 P3.2 | length 777.8
  Top Layer w10: B1.15 2801.05,1900 3031.05,2130 P3.2
MCU_TX-GPS_RX: B1.27 P5.4 | length 790.3
  Top Layer w10: P5.4 1861.05,1740 1921.05,1800 B1.27
MCU_TX-PI_RX: B1.14 P3.3 | length 777.8
  Top Layer w10: B1.14 2802.05,1800 3032.05,2030 P3.3
NetC7_2: C7.2 R3.1 R4.2 | length 468
  Top Layer w30: C7.2 R4.2 3501.15,3021.89 3541.44,3021.89 3559.02,3039.46 3559.02,3254.15 R3.1
NRF24_IRQ: B1.8 P8.8 | length 1487.5
  Top Layer w10: P8.8 2079.63,170 2045.86,170 2040,175.86 2040,305 2192.72,457.72 v3(2192.72,1195)
  Bottom Layer w10: v3(2192.72,1195) 2194.63,1196.91 2527.96,1196.91 B1.8
OUTPUT3V3: D1.1 IC1.2 L1.2 | length 854
  Top Layer w30: IC1.2 508.7,2068.46 548.23,2028.93 1021.05,2028.93 1025.58,2033.46 D1.1 1040.34,2164.52 1094.24,2218.42 L1.2
OUTPUT5V: D2.1 IC2.2 L2.2
OUTPUT6V: D3.1 IC3.2 L3.2
PA4: B1.29 P10.5 | length 1527.7
  Top Layer w10: P10.5 1254.15,549 1624.02,918.86 v1(1624.02,969.24) ; v1(1624.02,1494) 1730.02,1600 B1.29
  Bottom Layer w10: v1(1624.02,969.24) v1(1624.02,1494)
PA5: B1.30 P10.4 | length 1524.5
  Top Layer w10: P10.4 1243.76,449 1719.02,924.25 v1(1719.02,969.24) ; v1(1719.02,1494) 1925.05,1494 B1.30
  Bottom Layer w10: v1(1719.02,969.24) v1(1719.02,1494)
PA10: B1.7 P9.1 | length 682.5
  Top Layer w10: B1.7 P9.1
PB0: B1.33 R1.2 R2.1 Z1.1 | length 1214
  Top Layer w10: R1.2 1510.83,213.81 1588.27,213.81 R2.1 1600,225.54 v3(1600,415) ; Z1.1 1770,854.45 1770,1048.95 1921.05,1200 B1.33
  Bottom Layer w10: v3(1600,415) 1600,684.45 Z1.1
PB1: B1.34 P10.3 | length 1201.4
  Top Layer w10: P10.3 1399.32,349 1824.02,773.7 1824.02,1004 1901.38,1081.36 1912.41,1081.36 B1.34
PB10: B1.35 P10.2 | length 1164.2
  Top Layer w10: P10.2 1188.13,249 1268.13,329 1416.81,329 1844.02,756.21 1844.02,922.97 1921.05,1000 B1.35
PB11: B1.36 P10.1 | length 1573.9
  Top Layer w10: P10.1 1203.13,121.5 1771.05,121.5 2030,380.45 2030,870 2000,900 B1.36
PB12: B1.1 P9.5 | length 765.3
  Top Layer w10: B1.1 2816.05,500 3016.05,700 P9.5
PB13: B1.2 P9.4 | length 765.3
  Top Layer w10: B1.2 2821.05,600 3021.05,800 P9.4
PB14: B1.3 P9.3 | length 765.3
  Top Layer w10: B1.3 2816.05,700 3016.05,900 P9.3
PB15: B1.4 P9.2 | length 765.3
  Top Layer w10: B1.4 2801.05,800 3001.05,1000 P9.2
PC13: B1.22 P9.6 | length 2983
  Top Layer w10: B1.22 2281.05,1950 v3(2281.05,545)
  Bottom Layer w10: v3(2281.05,545) 2281.05,510.86 2376.91,415 3016.05,415 3201.05,600 P9.6
PC14: B1.23 P9.7 | length 2874.7
  Top Layer w10: B1.23 2240.05,1891 v3(2240.05,545)
  Bottom Layer w10: v3(2240.05,545) 2241.96,543.09 2241.96,521.66 2368.62,395 3024.33,395 3129.33,500 P9.7
PC15: B1.24 P10.7 | length 1822.3
  Top Layer w10: P10.7 1316.05,749 v1(1537.05,970) ; v1(1801.05,2100) B1.24
  Bottom Layer w10: v1(1537.05,970) 1537.05,1752.03 1801.05,2016.03 v1(1801.05,2100)
RPWM: B1.5 P1.1 | length 1060.4
  Top Layer w10: B1.5 2813.55,900 v3(2946.05,1032.5)
  Bottom Layer w10: v3(2946.05,1032.5) 2946.05,1243 3205.55,1502.5 P1.1
ServoDoor: B1.25 P11.1 | length 1713.3
  Bottom Layer w10: B1.25 1935.07,1995.98 1986.05,1995.98 2012.03,1970 2075.02,1970 2094.02,1989 2094.02,2429 2209.02,2544 2774.02,2544 2799.02,2519 2799.02,2299 2819.02,2279 2885.02,2279 P11.1
ServoPWM: B1.26 P7.1 | length 2283
  Top Layer w10: B1.26 2016.05,1900 2054.02,1937.97 v3(2054.02,2021.53) ; v3(3206.55,2379) 3297.55,2288 P7.1
  Bottom Layer w10: v3(2054.02,2021.53) 2054.02,2454 2194.02,2594 2962.08,2594 3177.08,2379 v3(3206.55,2379)
SPI1_CE: B1.10 P8.2 | length 1248
  Top Layer w10: P8.2 2296.63,412.62 2390,505.98 2390,1268.95 2521.05,1400 B1.10
SPI1_CSN: B1.9 P8.6 | length 1249.4
  Top Layer w10: P8.6 2295.63,167 2351.63,223 2351.63,356.62 2424.02,429 2424.02,1202.97 2521.05,1300 B1.9
SPI1_MISO: B1.12 P8.4 | length 1528.8
  Top Layer w10: P8.4 2096.63,311.63 2315,530 2315,1393.95 2521.05,1600 B1.12
SPI1_MOSI: B1.13 P8.7 | length 2225.2
  Top Layer w10: v3(2186.05,1700) 2096.63,1610.58 2096.63,412.5 2000,315.87 2000,145.87 2049.87,96 2149.63,96 2196.13,142.5 P8.7
  Bottom Layer w10: v3(2186.05,1700) B1.13
SPI1_SCK: B1.11 P8.3 | length 1383.1
  Top Layer w10: P8.3 2206.05,263.42 2206.05,372.42 2351.63,518 2351.63,1294.22 2512.41,1455 2512.41,1481.36 B1.11
UU: J1.2 J1.3 J1.6 J1.7 J1.9 J1.10 J1.11 J1.12
VCC3V3: B1.20 C1.1 IC1.4 L1.1 P1.2 P1.4 P1.6 P2.2 P4.2 P5.1 P6.1 P8.5 | length 10771
  Top Layer w10: 3306.55,1370 3306.55,1514.5 P1.2 3306.05,1516 3306.05,1616 P1.6
  Top Layer w30: IC1.4 642.56,2189.92 999.05,2546.41 1072.15,2546.41 L1.1 1128.1,2602.36 C1.1@1556.05,2602.36 ; P5.1 1041.4,1440 956.25,1525.15 ; P4.2 1419.38,1076.75 1170.88,1076.75 P2.2 1055.14,1077 956.25,1175.9 ; C1.1@1556.05,2618.5 C1.1@1572.55,2635 ; P6.1 2044.53,2696.89 2027.03,2679.39 2027.03,2706.59 1954.62,2779 ; 2344.71,74 2344.71,85.86 2395.63,136.78 P8.5 ; B1.20@2521.05,2400 B1.20 2531.05,2754.39 2506.05,2779.39 1955.01,2779.39 1954.62,2779 ; P1.4 3505.55,1500.5 3437.43,1432.38 3368.93,1432.38 3306.55,1370 3306.55,355.5 3017.05,66 1068.63,66 956.25,178.38 956.25,1175.9 ; 956.25,1175.9 956.25,1525.15 ; 956.25,1525.15 956.25,1802.6 1037.65,1884 1595.63,1884 1705.63,1994 1705.63,2432.03 1556.05,2581.61 C1.1 1734.74,2779 1954.62,2779
VCC5V: C3.1 IC2.4 J1.1 J1.5 L2.1
VCC6V: C6.1 C7.1 L3.1 P7.2 P11.2 R4.3 | length 1648.7
  Top Layer w30: C6.1 3103.65,2709.39 3257.55,2863.29 3257.55,3043.29 3332.55,3118.29 R4.3
  Top Layer w70: P11.2 3043.46,2389 3103.65,2449.2 3103.65,2609.36 ; C6.1 3103.65,2609.36 ; P7.2 3324.02,2389 3103.65,2609.36
pads on no net: B1.18 B1.21 B1.37 B1.38 IC1.7 IC1.8 IC2.7 IC2.8 P3.1 P3.5 P6.5 P10.6

## Polygon pours and split planes (outlines as drawn)
GND on Top Layer "Top Layer-GND" (solid, pour order 58): 0,3860 3645,3860 3645,0 3644.95,0.05 0,0.05
VCC5V on Top Layer "Top Layer-No Net 1" (solid, pour order 52): 575.63,3595.27 900,3595.27 900,3305 1283.07,3305 1283.07,3144.49 1635.09,3144.49 1725.61,3235 1860,3235 1860,3284.29 1495.67,3284.29 1495.67,3465 1055,3465 1055,3705 575,3705
OUTPUT5V on Top Layer "Top Layer-No Net" (solid, pour order 50): 1852.8,3430 1665,3430 1665,3845 1380,3845 1380,3603.88 1495.67,3603.88 1495.67,3758.9 1513.66,3758.9 1556.05,3758.9 1556.05,3360 1851.16,3360
12V on Top Layer "Top Layer-12-5" (solid, pour order 48): 1768.5,3671.3 1767.48,3670.28 1767.48,3444.92 1852.52,3444.92 1852.52,3571.12 1885,3571.12 1885,3020 1975,3020 1975,3671.3
VCC6V on Top Layer "Top Layer-VCC6V" (solid, pour order 46): 3170.47,3165.3 3168.55,3163.38 3168.55,2611.79 3032.68,2611.79 3032.68,3165.3
OUTPUT6V on Top Layer "Top Layer-output6V" (solid, pour order 44): 2650.79,3165.3 2650.79,2952.7 2948.03,2952.7 2948.03,3629 3100.51,3629 3100.51,3682.46 2903.24,3682.46 2856.57,3635.79 2856.57,3167.7 2653.19,3167.7
no net on Top Layer "Top Layer-No Net 2" (solid, pour order 42): 3155,3695
12V on Top Layer "Top Layer-12-6" (solid, pour order 40): 3101.89,3774.91 2489.02,3774.91 2489.02,2974 2299.02,2974 2299.02,2874 2569.02,2874 2569.02,3659.53 2833.64,3659.53 2879.5,3705.39 3100.51,3705.39
12V on Top Layer "Top Layer-12-3" (solid, pour order 32): 245.63,1815 421.69,1815 421.69,2175.98 461.85,2175.98 461.85,1764.5 245.63,1764.5
12V on Top Layer "Top Layer- 12V Main" (solid, pour order 8): 30.63,738.5 295.63,738.5 295.63,2829 2365.84,2829 2365.84,3064 30.63,3064
GND on Bottom Layer "Bottom Layer-GND" (solid, pour order 56): 0,3860 3645,3860 3645,0 0,0
VCC5V on Bottom Layer "Bottom Layer-5V" (solid, pour order 30): 570.63,3704 570.63,3594 775.63,3594 775.63,3704

## Keep-outs
Top Layer:
  the board outline again, w10